# Altium PCB TCRME lab3.PcbDoc
Units mil, origin at the board's own origin, x right, y up, seen from the top; angles counter-clockwise.
Board outline 6000 x 4000 mil, 2 copper layers (Top Layer, Bottom Layer); 24 components, 24 nets, 91 pads, 0 vias.
Unrouted connection lines stored in the file: 57.
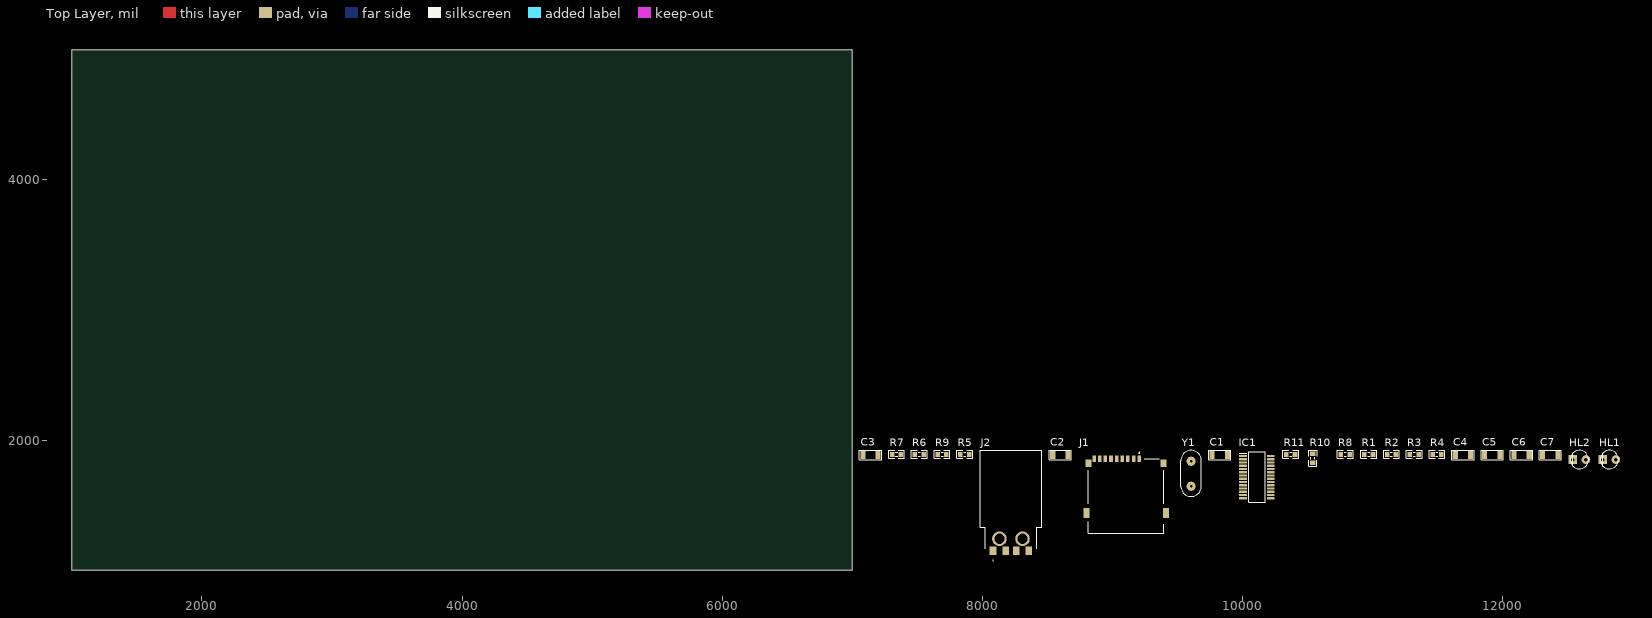
[diagram p0: Top Layer view]
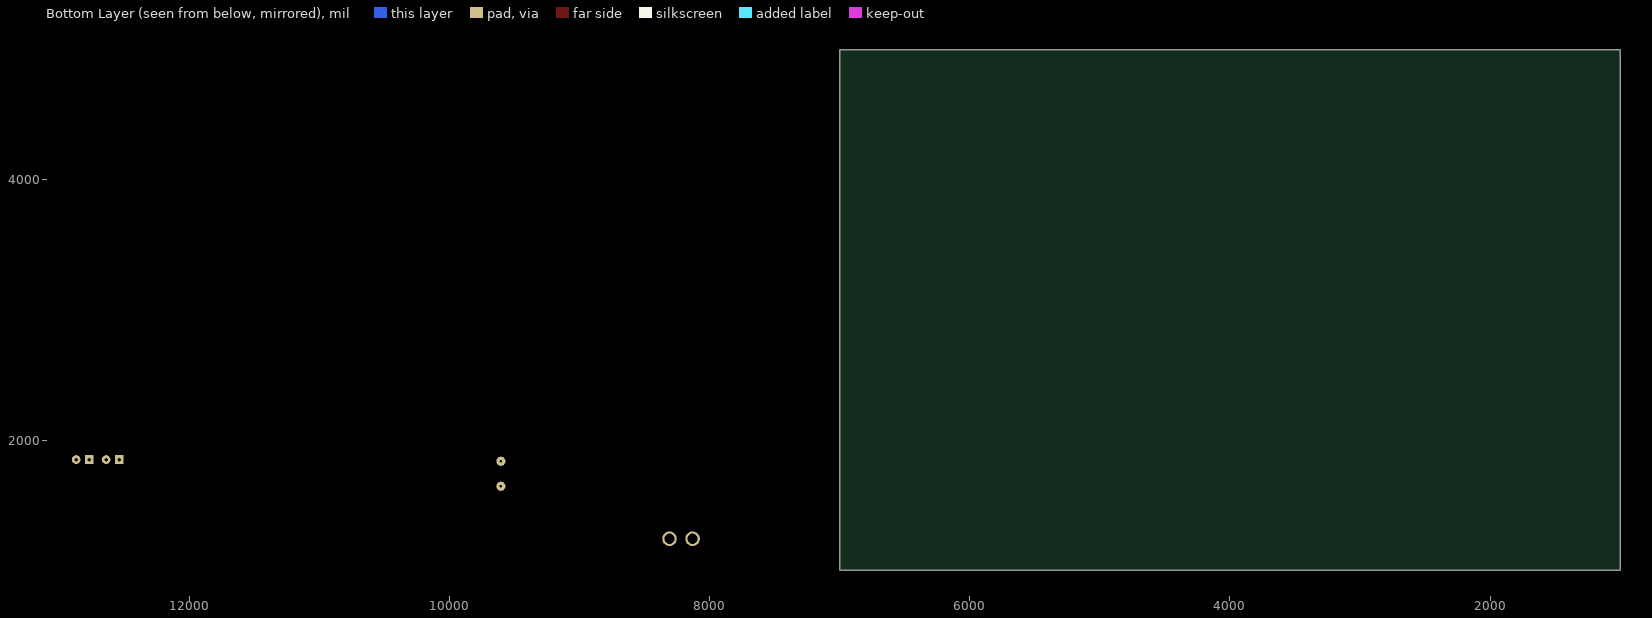
[diagram p1: Bottom Layer view, seen from below]

## Layer stack, top to bottom
Top Solder: solder mask 0.4, Solder Resist, Dk 3.5
Top Layer: signal copper 1.4
Dielectric 1: dielectric 12.6, FR-4, Dk 4.8
Bottom Layer: signal copper 1.4
Bottom Solder: solder mask 0.4, Solder Resist, Dk 3.5

## Board outline
1000,1000 7000,1000 7000,5000 1000,5000

## Design rules (kind name [scope] priority, off if disabled: settings)
Clearance [All] p1: gap=10 ignorepadtopadclearanceinfootprint=FALSE except(0: Arc-Hole Track-Hole SMDPad-Hole THPad-Hole Via-Hole Fill-Hole Poly-Hole Region-Hole Text-Hole)
PolygonConnect [All] p1: connectstyle=Relief reliefconductorwidth=10 reliefentries=4 polygonreliefangle="90 Angle" airgapwidth=10
RoomDefinition "TCRME lab3" [InComponentClass('TCRME lab3')] p1: confinementstyle=ConfineIn formatcopy=TRUE lockcomponents=FALSE outline 7045,1060 12915,1060 12915,2030 7045,2030
RoutingVias [All] p1: holewidth=28 width=50 viastyle="Through Hole" minholewidth=28 minwidth=50 maxholewidth=28 maxwidth=50
SolderMaskExpansion [All] p1: expansion=4 istentingtop=FALSE
Width [All] p1: maxlimit=10 minlimit=10 preferedwidth=10
30 further rules are at their usual default settings.

## Components (designator, comment, footprint, x,y, rotation, side; value= is the part's Value field where it differs from the comment)
C1 "22pF" 1206 9825,1885 r0 top
C2 "22pF" 1206 8600,1885 r0 top
C3 "0.1 uF" 1206 7140,1885 r0 top
C4 "0.1 uF" 1206 11695,1885 r0 top
C5 "0.1 uF" 1206 11920,1885 r0 top
C6 "0.1 uF" 1206 12145,1885 r0 top
C7 "0.1 uF" 1206 12365,1885 r0 top
HL1 "R&W" LED_3MM_GREEN 12770,1850 r0 top
HL2 "PWR" LED_3MM_GREEN 12540,1850 r0 top
IC1 "GL827L-HHY02" SOP64P600X175-28N 10110,1715 r0 top
J1 "TF-01A" TF01A 9105,1570 r0 top
J2 "629004113921" 629004113921 8220,1920 r0 top
R1 "10k Ω" RESC1608(0603)N 10970,1890 r0 top
R2 "10k Ω" RESC1608(0603)N 11145,1890 r0 top
R3 "10k Ω" RESC1608(0603)N 11320,1890 r0 top
R4 "10k Ω" RESC1608(0603)N 11495,1890 r0 top
R5 "22 Ω" RESC1608(0603)N 7865,1890 r0 top
R6 "22 Ω" RESC1608(0603)N 7515,1890 r0 top
R7 "10k Ω" RESC1608(0603)N 7340,1890 r0 top
R8 "10k Ω" RESC1608(0603)N 10790,1890 r0 top
R9 "1k Ω" RESC1608(0603)N 7690,1890 r0 top
R10 "330 Ω" RESC1608(0603)N 10540,1860 r90 top
R11 "330 Ω" RESC1608(0603)N 10370,1890 r0 top
Y1 "HC49S-3" HC49S-3 9605,1645 r90 top

## Footprints (in the part's own frame and the unit in brackets; to place one, negate y for a bottom-side part, rotate by r counter-clockwise, add the part's x,y. Pads: shape width x height; smd on the part's side, far side on the other; paste and mask are expansions set on the pad)
1206 [mm]
  rect 1x1.6 smd: 1(-1.499,0) 2(1.501,0)
  silkscreen extent -2.16,-0.97 2.16,0.97, body extent -1.6,-0.8 1.6,0.8, height 0.6
629004113921 [mm]
  rect 1.3x1.7 smd: 1(-3.5,-19.6) 2(-1,-19.6) 3(1,-19.6) 4(3.5,-19.6)
  round 2.85 hole 2: 5(-2.25,-17.25) 6(2.25,-17.25)
  silkscreen extent -6,-21.52 6,0, body extent -6,-19.82 6,-0.03, height 2.2
HC49S-3 [mm]
  round 1.8 hole 0.5: 1(0,0) 2(4.88,0)
  silkscreen extent -2,-2 7,2
LED_3MM_GREEN [mm]
  rect 1.7x1.7 hole 0.7: 1(0,0)
  round 1.7 hole 0.7: 2(2.54,0)
  silkscreen extent -0.53,-1.8 3.07,1.8, body extent -0.39,-1.65 2.91,1.65, height 5.51
RESC1608(0603)N [mm] "Chip Resistor, Body 1.6x0.8mm, IPC Medium Density"
  rect 0.9x1 smd: 1(-0.85,0) 2(0.85,0)
  silkscreen extent -1.55,-0.76 1.55,0.76, body extent -0.8,-0.4 0.8,0.4, height 0.3
SOP64P600X175-28N [mm]
  rect 1.525x0.435 smd: 1(-2.712,4.128) 2(-2.712,3.492) 3(-2.712,2.858) 4(-2.712,2.222) 5(-2.712,1.588) 6(-2.712,0.952) 7(-2.712,0.318) 8(-2.712,-0.318) 9(-2.712,-0.952) 10(-2.712,-1.588) 11(-2.712,-2.222) 12(-2.712,-2.858) 13(-2.712,-3.492) 14(-2.712,-4.128) 15(2.712,-4.128) 16(2.712,-3.492) 17(2.712,-2.858) 18(2.712,-2.222) 19(2.712,-1.588) 20(2.712,-0.952) 21(2.712,-0.318) 22(2.712,0.318) 23(2.712,0.952) 24(2.712,1.588) 25(2.712,2.222) 26(2.712,2.858) 27(2.712,3.492) 28(2.712,4.128)
  silkscreen extent -3.47,-4.95 1.6,4.95, body extent -3,-4.95 3,4.95, height 1.75
TF01A [mm]
  rect 0.7x1.3 smd: 1(2.56,7.25) 2(1.46,7.25) 3(0.36,7.25) 4(-0.74,7.25) 5(-1.84,7.25) 6(-2.94,7.25) 7(-4.04,7.25) 8(-5.14,7.25) CD1(-6.24,7.25)
  round 0.5 hole 1 unplated: 14(-4.95,-3.3) 15(3.05,-3.3)
  rect 1.2x1.4 smd: MP1(-7.34,6.4) MP4(7.34,6.4)
  rect 1.2x2 smd: MP2(-7.76,-3.3) MP3(7.76,-3.3)
  silkscreen extent -7.4,-7.25 7.4,8.5, body extent -8.8,-7.92 9.02,8.18, height 2.05

## Part data
C1 C2 C3 C4 C5 C6 C7: library part 1206B221M251CT, "Cap Cer MLCC SMD 220pF 250V X7R 20% 1206", Mouser Part Number=791-1206B221M251CT, Package=1206, HelpURL=https://eu.mouser.com/ProductDetail/Walsin/1206B221M251CT?qs=ZrPdAQfJ6DONB%2FPOr%252Bgk%2Fg%3D%3D, Manufacturer Part Number=1206B221M251CT, Note=Backorder, Part Number=1206B221M251CT
HL1 HL2: library part "FYL-5013 GD", Part Number="FYL-5013 GD"
IC1: "Integrated Circuit", Manufacturer_Name="Genesys Logic", Datasheet Link=https://datasheet.lcsc.com/szlcsc/Genesys-Logic-GL827L-HHY02_C161839.pdf, Height=1.75mm, Manufacturer_Part_Number=GL827L-HHY02
J1: "Connector", Manufacturer_Name="Korean Hroparts Elec", Datasheet Link=https://datasheet.lcsc.com/szlcsc/1903221101_Korean-Hroparts-Elec-TF-01A_C91145.pdf, Height=1.85mm, Manufacturer_Part_Number=TF-01A
J2: "Connector", Manufacturer_Name="Wurth Elektronik", Mouser Part Number=710-629004113921, Datasheet Link=http://katalog.we-online.de/em/datasheet/629004113921.pdf, Manufacturer_Part_Number=629004113921, Mouser Price/Stock=https://www.mouser.co.uk/ProductDetail/Wurth-Elektronik/629004113921?qs=35zkduByVmhHRkVkRjAlEQ%3D%3D
R1 R2 R3 R4 R5 R6 R7 R8 R9 R10 R11: library part CPF0603F137KC1, "RES SMD 0603 137k 1% 50ppm", Mouser Part Number=279-CPF0603F137KC1, Package=0603, HelpURL=https://eu.mouser.com/ProductDetail/TE-Connectivity-Holsworthy/CPF0603F137KC1?qs=%2Fha2pyFadujSa3OD4DCoYOqNfY8rbrxkv%2FEBUVUJ1iFL1vG%2FD14mug%3D%3D, Manufacturer Part Number=CPF0603F137KC1, Part Number=CPF0603F137KC1, Price$=0.022
Y1: Part Number=HC49S-3

## Nets (pads, with @x,y where several pads share a name; then routed paths per layer and width w, separated by ;. In a path a pad name is that pad's centre, name@x,y a point inside that pad or via, vN(x,y) a via of type N, cw(c..) or ccw(c..) an arc to the next point about the centre after c; other vN are vias at no path point)
+3V3: C6.2 C7.2 IC1.7 IC1.11 R1.2 R2.2 R3.2 R4.2 R7.2 R8.2
+5V: C4.2 C5.2 IC1.12 J2.1
GND: C1.1 C2.1 C3.1 C4.1 C5.1 C6.1 C7.1 HL1.2 HL2.2 IC1.6 J1.6 J1.MP1 J1.MP2 J1.MP3 J1.MP4 J2.4 R9.2
NetC1_2: C1.2 IC1.4 Y1.1
NetC2_2: C2.2 IC1.5 Y1.2
NetC3_2: C3.2 IC1.13 R7.1
NetHL1_1: HL1.1 R10.1
NetHL2_1: HL2.1 R11.1
NetIC1_1: IC1.1 IC1.3 R8.1
NetIC1_2: IC1.2 J1.4
NetIC1_8: IC1.8 R6.1
NetIC1_9: IC1.9 R5.2
NetIC1_10: IC1.10 R9.1
NetIC1_15: IC1.15 J1.CD1
NetIC1_16: IC1.16 J1.8 R4.1
NetIC1_17: IC1.17 J1.7 R3.1
NetIC1_20: IC1.20 J1.5
NetIC1_22: IC1.22 J1.3
NetIC1_24: IC1.24 J1.2 R2.1
NetIC1_25: IC1.25 J1.1 R1.1
NetIC1_27: IC1.27 R10.2
NetIC1_28: IC1.28 R11.2
NetJ2_2: J2.2 R5.1
NetJ2_3: J2.3 R6.2
pads on no net: IC1.14 IC1.18 IC1.19 IC1.21 IC1.23 IC1.26 J1.14 J1.15 J2.5 J2.6